# Altium PCB PCB1.PcbDoc
Units mil, origin at the board's own origin, x right, y up, seen from the top; angles counter-clockwise.
Board outline 6000 x 4000 mil, 2 copper layers (Top Layer, Bottom Layer); 1 components, 0 nets, 56 pads, 0 vias.
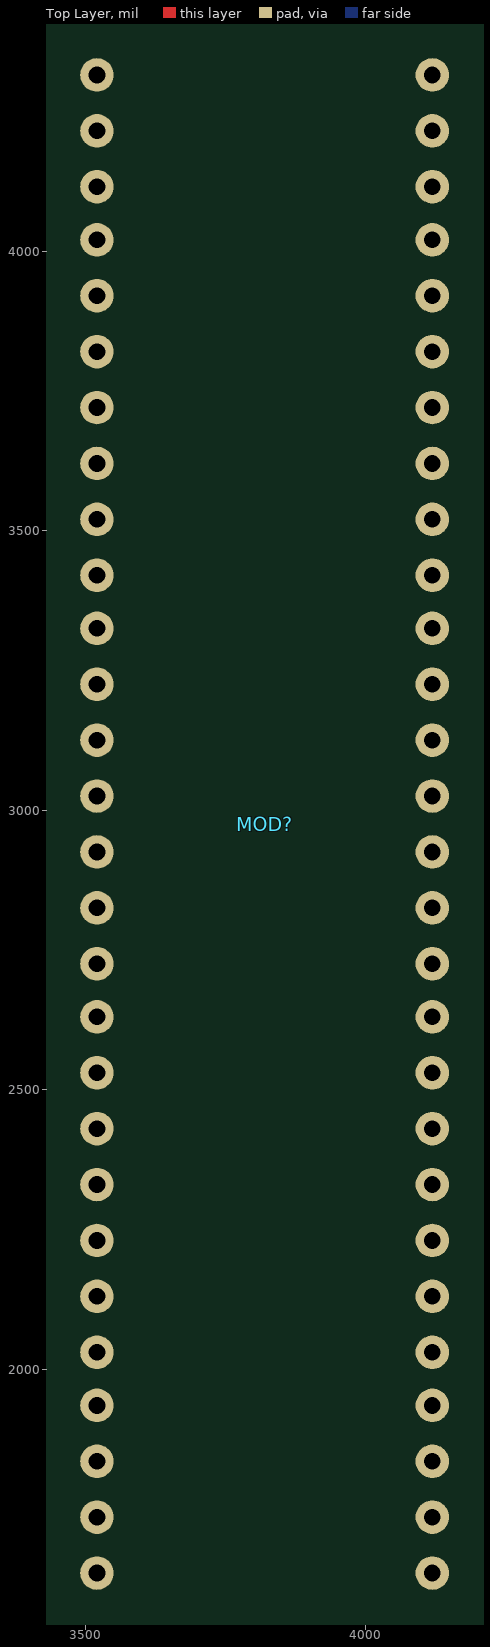
[diagram p0: Top Layer view]
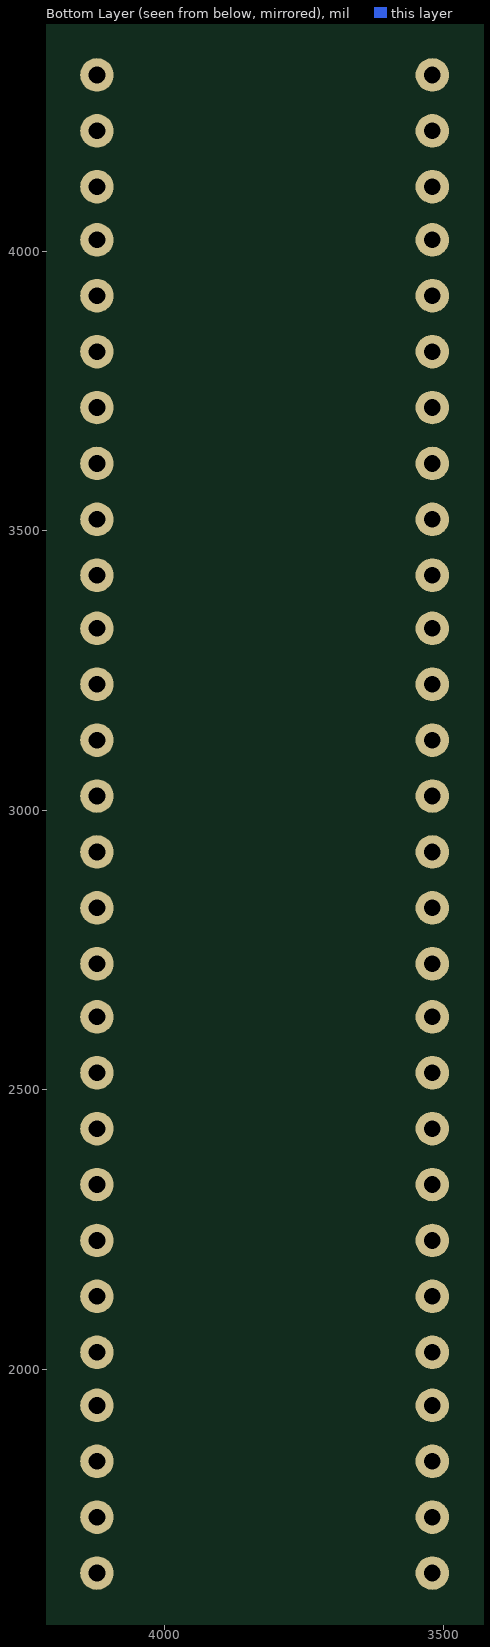
[diagram p1: Bottom Layer view, seen from below]

## Layer stack, top to bottom
Top Solder: solder mask 0.4, Solder Resist, Dk 3.5
Top Layer: signal copper 1.4
Dielectric 1: dielectric 12.6, FR-4, Dk 4.8
Bottom Layer: signal copper 1.4
Bottom Solder: solder mask 0.4, Solder Resist, Dk 3.5

## Board outline
1000,1000 7000,1000 7000,5000 1000,5000

## Design rules (kind name [scope] priority, off if disabled: settings)
Clearance [All] p1: gap=10 ignorepadtopadclearanceinfootprint=FALSE
PolygonConnect [All] p1: connectstyle=Relief reliefconductorwidth=10 reliefentries=4 polygonreliefangle="90 Angle" airgapwidth=10
RoutingVias [All] p1: holewidth=28 width=50 viastyle="Through Hole" minholewidth=28 minwidth=50 maxholewidth=28 maxwidth=50
SolderMaskExpansion [All] p1: expansion=4 istentingtop=FALSE
Width [All] p1: maxlimit=10 minlimit=10 preferedwidth=10
30 further rules are at their usual default settings.

## Components (designator, comment, footprint, x,y, rotation, side; value= is the part's Value field where it differs from the comment)
MOD? "avr128 curiosity nano" "avr128 curiosity nano" 4125,1620 r90 top

## Footprints (in the part's own frame and the unit in brackets; to place one, negate y for a bottom-side part, rotate by r counter-clockwise, add the part's x,y. Pads: shape width x height; smd on the part's side, far side on the other; paste and mask are expansions set on the pad)
"avr128 curiosity nano" [mil]
  round 60 hole 30: 1(15,5) 2(115,5) 3(215,5) 4(315,5) 5(410,5) 6(510,5) 7(610,5) 8(710,5) 9(810,5) 10(910,5) 11(1010,5) 12(1105,5) 13(1205,5) 14(1305,5) 15(1405,5) 16(1505,5) 17(1605,5) 18(1705,5) 19(1800,5) 20(1900,5) 21(2000,5) 22(2100,5) 23(2200,5) 24(2300,5) 25(2400,5) 26(2495,5) 27(2595,5) 28(2695,5) 29(2695,605) 30(2595,605) 31(2495,605) 32(2400,605) 33(2300,605) 34(2200,605) 35(2100,605) 36(2000,605) 37(1900,605) 38(1800,605) 39(1705,605) 40(1605,605) 41(1505,605) 42(1405,605) 43(1305,605) 44(1205,605) 45(1105,605) 46(1010,605) 47(910,605) 48(810,605) 49(710,605) 50(610,605) 51(510,605) 52(410,605) 53(315,605) 54(215,605) 55(115,605) 56(15,605)
  body extent -315,-100 3005,700, height 237

## Nets (pads, with @x,y where several pads share a name; then routed paths per layer and width w, separated by ;. In a path a pad name is that pad's centre, name@x,y a point inside that pad or via, vN(x,y) a via of type N, cw(c..) or ccw(c..) an arc to the next point about the centre after c; other vN are vias at no path point)
pads on no net: MOD?.1 MOD?.2 MOD?.3 MOD?.4 MOD?.5 MOD?.6 MOD?.7 MOD?.8 MOD?.9 MOD?.10 MOD?.11 MOD?.12 MOD?.13 MOD?.14 MOD?.15 MOD?.16 MOD?.17 MOD?.18 MOD?.19 MOD?.20 MOD?.21 MOD?.22 MOD?.23 MOD?.24 MOD?.25 MOD?.26 MOD?.27 MOD?.28 MOD?.29 MOD?.30 MOD?.31 MOD?.32 MOD?.33 MOD?.34 MOD?.35 MOD?.36 MOD?.37 MOD?.38 MOD?.39 MOD?.40 MOD?.41 MOD?.42 MOD?.43 MOD?.44 MOD?.45 MOD?.46 MOD?.47 MOD?.48 MOD?.49 MOD?.50 MOD?.51 MOD?.52 MOD?.53 MOD?.54 MOD?.55 MOD?.56